# Altium PCB TSAL_ControlV2.1.PcbDoc (part 2 of 3)
Units mm, origin at the board's own origin, x right, y up, seen from the top; angles counter-clockwise.
Board outline 110 x 55.6 mm, 4 copper layers (Top Layer, GND, PWR, Bottom Layer), stack 1.488 mm thick; 168 components, 77 nets, 452 pads, 194 vias.
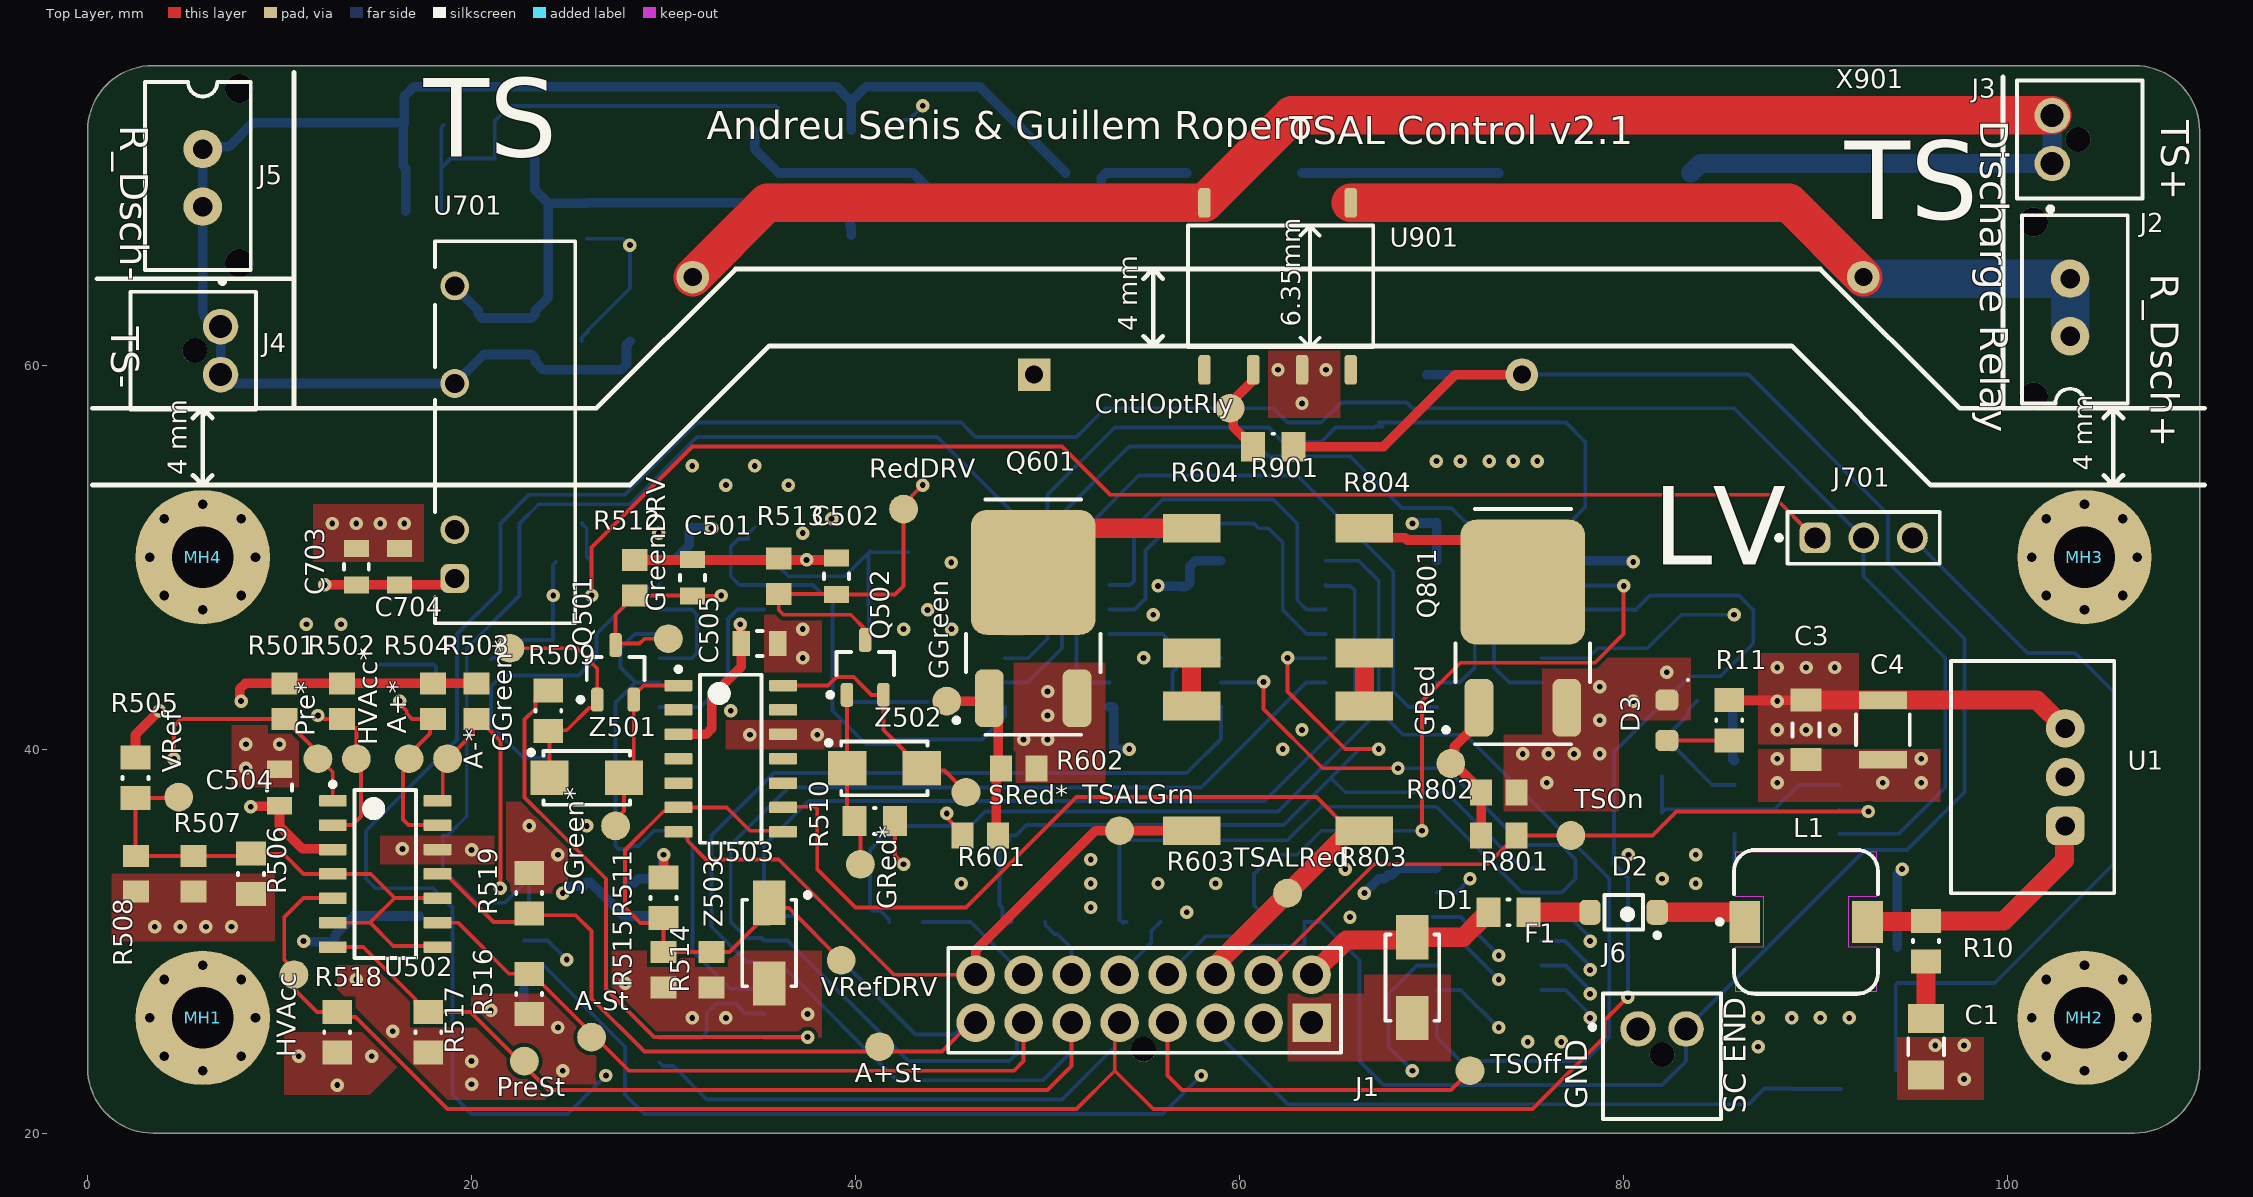
[diagram p0: Top Layer view]

## Part data (continued)
R501 R502 R503 R504 R512 R513 R602 R802: library part CMP-00076-3, "Res Thick Film 0805 1K Ohm 5% 1/8W ±200ppm/°C Molded SMD SMD Paper Tape on Plastic Reel", Case Code (Metric)=2012, Case/Package=0805, Manufacturer 1=Bourns, Manufacturer Part Number 1=CR0805-JW-102ELF, Max Operating Temperature=155°C, Max Power Dissipation=125mW, Min Operating Temperature=-55°C, Package Quantity=1, Resistor Type="Thick Film", Temperature Coefficient=200ppm/°C, Tolerance=5%, Voltage Rating=150V, .Creator=GP, Category="Chip SMD Resistors", ComponentLink1Description=https://datasheet.ciiva.com/11821/0900766b80fcdb72-11821134.pdf?src-supplier=RSComponents, ComponentLink1URL=https://datasheet.ciiva.com/11821/0900766b80fcdb72-11821134.pdf?src-supplier=RSComponents, ComponentLink2Description=https://datasheet.ciiva.com/15225/getdatasheetpartid-78155-15225381.pdf?src-supplier=Verical, ComponentLink2URL=https://datasheet.ciiva.com/15225/getdatasheetpartid-78155-15225381.pdf?src-supplier=Verical, ComponentLink3Description=https://datasheet.ciiva.com/22693/1902866-22693253.pdf?src-supplier=Element14, ComponentLink3URL=https://datasheet.ciiva.com/22693/1902866-22693253.pdf?src-supplier=Element14, ComponentLink4Description=https://datasheet.ciiva.com/7986/1856384-7986184.pdf?src-supplier=Element14, ComponentLink4URL=https://datasheet.ciiva.com/7986/1856384-7986184.pdf?src-supplier=Element14, ComponentLink5Description=https://datasheet.ciiva.com/7985/1856384-7985867.pdf?src-supplier=Element14, ComponentLink5URL=https://datasheet.ciiva.com/7985/1856384-7985867.pdf?src-supplier=Element14, ComponentLink6Description=https://datasheet.ciiva.com/30242/159chpreztr-30242765.pdf?src-supplier=Onlinecomponents.com, ComponentLink6URL=https://datasheet.ciiva.com/30242/159chpreztr-30242765.pdf?src-supplier=Onlinecomponents.com, ComponentLink7Description=https://datasheet.ciiva.com/6547/chpreztr-6547359.pdf?src-supplier=Digi-Key, ComponentLink7URL=https://datasheet.ciiva.com/6547/chpreztr-6547359.pdf?src-supplier=Digi-Key, Contact Plating=Tin, Depth=1.25mm, Design Item ID=R1k-0805FTK, Features="Moisture Resistant", Height=0.5mm, Lead Free="Lead Free", Length=2mm, Military Standard=Not, Mount="Surface Mount", Number of Terminations=2, Packaging="Tape and Reel", Pins=2, Power rating=125mW, Pricing 1="1=0,05930, 10=0,03510, 25=0,01790, 100=0,00800, 250=0,00790, 500=0,00590, 1000=0,00360, 3000=0,00350, 6000=0,00250 (USD)", Radiation Hardening=No, REACH SVHC="No SVHC", RoHS=Yes, Source=Passives.SchLib, Stock 1=27510, Termination=SMD/SMT, Thickness=508um, Voltage Rating (DC)=150V, Width=1.25mm
R505: library part CMP-009-00046-1, "Fixed Resistor, Metal Glaze/thick Film, 0.125W, 12400ohm, 150V, 1% +/-Tol, 100ppm/Cel, Surface Mount, 0805", Case/Package=0805, Max Operating Temperature=155°C, Min Operating Temperature=-55°C, Power=125mW, Tolerance=1%, Mounting Technology="Surface Mount", Pins=2, RoHS Compliant=Yes
R507 R508 R514 R515 R601 R703 R709 R710 R801: library part CMP-00083-3, "Res Thick Film 0805 100 Ohm 1% 1/8W ±100ppm/°C Molded SMD SMD Paper Tape on Plastic Reel", Case Code (Metric)=2012, Case/Package=0805, Manufacturer 1=Bourns, Manufacturer Part Number 1=CR0805-FX-1000ELF, Max Operating Temperature=155°C, Max Power Dissipation=125mW, Min Operating Temperature=-55°C, Package Quantity=1, Resistance Tolerance=1%, Resistor Type="Thick Film", Temperature Coefficient=100ppm/°C, Voltage Rating=150V, .Creator=DR, Category="Chip SMD Resistors", ComponentLink1Description=https://datasheet.ciiva.com/11809/0900766b80fcdb72-11809178.pdf?src-supplier=RSComponents, ComponentLink1URL=https://datasheet.ciiva.com/11809/0900766b80fcdb72-11809178.pdf?src-supplier=RSComponents, ComponentLink2Description=https://datasheet.ciiva.com/6547/chpreztr-6547413.pdf?src-supplier=Digi-Key, ComponentLink2URL=https://datasheet.ciiva.com/6547/chpreztr-6547413.pdf?src-supplier=Digi-Key, ComponentLink3Description=https://datasheet.ciiva.com/6547/chpreztr-6547414.pdf?src-supplier=Digi-Key, ComponentLink3URL=https://datasheet.ciiva.com/6547/chpreztr-6547414.pdf?src-supplier=Digi-Key, ComponentLink4Description=https://datasheet.ciiva.com/6547/chpreztr-6547415.pdf?src-supplier=Digi-Key, ComponentLink4URL=https://datasheet.ciiva.com/6547/chpreztr-6547415.pdf?src-supplier=Digi-Key, ComponentLink5Description=https://datasheet.ciiva.com/9120/chpreztr-9120744.pdf?src-supplier=Avnet, ComponentLink5URL=https://datasheet.ciiva.com/9120/chpreztr-9120744.pdf?src-supplier=Avnet, Construction=Rectangular, Contact Plating=Tin, Depth=1.25mm, Design Item ID=R100-0805FTK, Features="Moisture Resistant", Height=0.5mm, Length=2mm, Military Standard=Not, Mount="Surface Mount", Number of Terminations=2, Packaging="Tape and Reel", Pins=2, Power rating=125mW, Pricing 1="1=0,05840, 10=0,03430, 25=0,01780, 100=0,00750, 250=0,00560, 500=0,00490, 3000=0,00470 (USD)", Radiation Hardening=No, REACH SVHC="No SVHC", RoHS=Yes, RoHS Compliant=Yes, Series=CR0805, Source=Passives.SchLib, Stock 1=49802, Technology="THICK FILM", Termination=SMD/SMT, Thickness=508um, Tolerance=1%, Voltage Rating (DC)=150V, Width=1.25mm
R509 R510 R708: library part CMP-009-00027-3, "Fixed Resistor, Metal Glaze/thick Film, 0.5W, 2000ohm, 150V, 1% +/-Tol, 100ppm/Cel, Surface Mount, 0805", Case/Package=0805, Manufacturer=Vishay, Max Operating Temperature=155°C, Min Operating Temperature=-55°C, Part Number=CRCW08052K00FKEAHP, Power=500mW, Tolerance=1%, Mounting Technology="Surface Mount", Pins=2, RoHS Compliant=Yes
R516 R517 R518 R519: library part CMP-009-00008-6, "Fixed Resistor, Metal Glaze/thick Film, 0.125W, 560000ohm, 150V, 1% +/-Tol, 100ppm/Cel, Surface Mount, 0805", Case/Package=0805, Max Operating Temperature=155°C, Min Operating Temperature=-55°C, Power=125mW, Tolerance=1%, Mounting Technology="Surface Mount", Pins=2, RoHS Compliant=Yes
R603 R604 R803 R804: library part CMP-00075-7, "Res Thick Film 2512 15 Ohm 1% 2W ±100ppm/C Pad SMD T/R", Case Code (Metric)=6432, Case/Package=2512, Manufacturer 1="TE Connectivity", Manufacturer Part Number 1=352115RFT, Max Operating Temperature=155°C, Max Power Dissipation=2W, Min Operating Temperature=-55°C, Number of Resistors=1, Resistance Tolerance=1%, Resistor Type="Thick Film,Power resistor", Temperature Coefficient=100ppm/°C, Voltage Rating=250V, .Creator=DR, Category="Chip SMD Resistors", ComponentLink1Description=Datasheet, ComponentLink1URL=https://docs.rs-online.com/8bc1/0900766b81096b90.pdf, ComponentLink2Description="Where buy it", ComponentLink2URL=https://es.rs-online.com/web/p/resistencias-de-montaje-en-superficie/7551110, ComponentLink3Description=https://datasheet.ciiva.com/25610/0900766b81096b90-25610033.pdf?src-supplier=RSComponents, ComponentLink3URL=https://datasheet.ciiva.com/25610/0900766b81096b90-25610033.pdf?src-supplier=RSComponents, ComponentLink4Description=https://datasheet.ciiva.com/46391/1610601-46391493.pdf?src-supplier=Element14, ComponentLink4URL=https://datasheet.ciiva.com/46391/1610601-46391493.pdf?src-supplier=Element14, ComponentLink5Description=https://datasheet.ciiva.com/7657/1610601-7657542.pdf?src-supplier=Element14, ComponentLink5URL=https://datasheet.ciiva.com/7657/1610601-7657542.pdf?src-supplier=Element14, Depth=3.2mm, Design Item ID=R15-2512FTK, ELV=Compliant, Features="Automotive AEC-Q200", Height=0.55mm, Length=6.3mm, Mount="Surface Mount", Number of Terminations=2, Packaging="Tape and Reel", Pricing 1="10=0,64300, 250=0,62200, 1000=0,60000, 2000=0,55400, 2500=0,52100 (USD)", REACH SVHC="No SVHC", RoHS=Yes, RoHS Compliant=Yes, Series="3521, CGS", Source=Passives.SchLib, Stock 1=1, Technology="THICK FILM", Termination=Solder, Tolerance=1%, Voltage Rating (DC)=250V
R701: library part CMP-00093-3, "Res Thick Film 0805 470 Ohm 1% 1/8W ±100ppm/°C Molded SMD SMD Paper Tape on Plastic Reel", Case Code (Metric)=2012, Case/Package=0805, Manufacturer 1=Bourns, Manufacturer Part Number 1=CR0805-FX-4700GLF, Max Operating Temperature=155°C, Max Power Dissipation=125mW, Min Operating Temperature=-55°C, Resistance Tolerance=1%, Resistor Type="Thick Film", Temperature Coefficient=100ppm/°C, Voltage Rating=150V, .Creator=DR, Category="Chip SMD Resistors", ComponentLink1Description=https://datasheet.ciiva.com/11808/0900766b80fcdb72-11808686.pdf?src-supplier=RSComponents, ComponentLink1URL=https://datasheet.ciiva.com/11808/0900766b80fcdb72-11808686.pdf?src-supplier=RSComponents, ComponentLink2Description=https://datasheet.ciiva.com/7985/1856384-7985880.pdf?src-supplier=Element14, ComponentLink2URL=https://datasheet.ciiva.com/7985/1856384-7985880.pdf?src-supplier=Element14, ComponentLink3Description=https://datasheet.ciiva.com/22693/1902866-22693247.pdf?src-supplier=Element14, ComponentLink3URL=https://datasheet.ciiva.com/22693/1902866-22693247.pdf?src-supplier=Element14, ComponentLink4Description=https://datasheet.ciiva.com/5541/chpreztr-5541930.pdf?src-supplier=Mouser, ComponentLink4URL=https://datasheet.ciiva.com/5541/chpreztr-5541930.pdf?src-supplier=Mouser, Construction=Rectangular, Contact Plating=Tin, Depth=1.25mm, Design Item ID=R470-0805FTK, Features="Moisture Resistant", Height=0.5mm, Length=2mm, Military Standard=Not, Mount="Surface Mount", Number of Terminations=2, Packaging="Tape and Reel", Pins=2, Power rating=125mW, Pricing 1="1=0,00990, 10=0,00980, 25=0,00950, 50=0,00940, 100=0,00930, 250=0,00920, 500=0,00910, 1000=0,00890, 3000=0,00870, 6000=0,00860 (USD)", Radiation Hardening=No, REACH SVHC="No SVHC", RoHS=Yes, Series=CR0805, Source=Passives.SchLib, Stock 1=12623, Technology="THICK FILM", Termination=SMD/SMT, Thickness=508um, Tolerance=1%, Voltage Rating (DC)=150V
R704 R901: library part CMP-009-00035-5, "Resistor, 10K, 0.25W, Thick Film, 0805 Rohs Compliant: Yes", Resistance=10k
R705: library part CMP-00108-3, "Current Sense Resistors - SMD 3watts .002ohms 1%", Case Code (Imperial)=2512, Case Code (Metric)=6432, Manufacturer="Vishay Dale", Manufacturer Part Number=WSLP25122L000FEA, Max Operating Temperature=170°C, Min Operating Temperature=-65°C, Package Quantity=2000, Power rating=3W, Resistance=2M, Resistor Type="Metal Strip", Temperature Coefficient=275ppm/°C, Tolerance=1%, Case/Package=2512, Category="Chip SMD Resistors", ComponentLink1Description=https://datasheet.ciiva.com/48527/wslp-48527354.pdf?src-supplier=Avnet, ComponentLink1URL=https://datasheet.ciiva.com/48527/wslp-48527354.pdf?src-supplier=Avnet, Design Item ID=R2M-2512FTK, Height=0.635mm, Lead Free="Lead Free", Length=6.4mm, Mount="Surface Mount", Packaging="Tape and Reel", Pricing 1="1=1,07000, 10=1,07000, 50=1,07000, 100=1,07000, 1000=0,77100, 10000=0,75500 (USD)", RoHS=Yes, RoHS Compliant=Yes, Series=WSLP, Size Code=2512, Source=Passives.SchLib, Stock 1=11994, Termination=SMD/SMT, Weight=0.001429oz, Width=3.2mm
R707: library part CMP-009-00018-5, "Fixed Resistor, Metal Glaze/thick Film, 0.125W, 51000ohm, 150V, 1% +/-Tol, 100ppm/Cel, Surface Mount, 0805. ERJ-6ENF5102V", Case/Package=0805, Max Operating Temperature=155°C, Min Operating Temperature=-55°C, Power=125mW, Tolerance=1%, Mounting Technology="Surface Mount", Pins=2, RoHS Compliant=Yes
U1: library part CMP-019-00006-2, "Switching Regulator 36V In / 12 V Out, 1A. 173011235", RoHS Compliant=Yes
U101 U302: library part CMP-00213-1, "AND Gate, 4000/14000/40000 Series, 3-Func, 3-Input, CMOS, PDSO14", Case/Package=SOP, Load Capacitance (CL)=50pF, Max Operating Temperature=125°C, Max Supply Voltage=18V, Min Operating Temperature=-55°C, Min Supply Voltage=3V, Nominal Supply Voltage=5V, Package Body Material=Plastic, Package Equivalence Code=SOP14,.25, Package Shape=Rectangular, Package Style="SMALL OUTLINEMeter", Peak Reflow Temperature (Cel)=260°C, Power Supplies=5/15V, Temperature Grade=MILITARY, Channels=3, Height - Seated (Max)=1.75mm, JESD-30 Code=R-PDSO-G14, JESD-609 Code=e4, Length=8.65mm, Load/Preset Input=Yes, Logic Type="AND GATE", Moisture Sensitivity Level=1, Number of Inputs=3, Packaging=Rail/Tube, Pins=14, Prop. Delay@Nom-Sup=250ns, Propagation Delay (tpd)=250ns, Qualification Status="Not Qualified", Reach SVHC Compliant=Yes, RoHS Compliant=Yes, Schmitt Trigger=No, Surface Mount=Yes, Technology=CMOS, Terminal Finish=Nickel, Terminal Form="Gull Wing", Terminal Pitch=1.27mm, Terminal Position=DUAL, Width=3.9mm
U201 U501: library part CMP-00217-1, "OR Gate, 4000/14000/40000 Series, 2-Func, 4-Input, CMOS, PDSO14", Case/Package=SOP, Load Capacitance (CL)=50pF, Max Operating Temperature=125°C, Max Supply Voltage=18V, Min Operating Temperature=-55°C, Min Supply Voltage=3V, Nominal Supply Voltage=5V, Package Body Material=Plastic, Package Equivalence Code=SOP14,.25, Package Shape=Rectangular, Package Style="SMALL OUTLINEMeter", Peak Reflow Temperature (Cel)=260°C, Power Supplies=5/15V, Temperature Grade=MILITARY, Channels=2, Height - Seated (Max)=1.75mm, JESD-30 Code=R-PDSO-G14, JESD-609 Code=e4, Length=8.65mm, Logic Type="OR GATE", Moisture Sensitivity Level=1, Number of Inputs=4, Output Characteristics=OPEN-COLLECTOR, Packaging=Rail/Tube, Pins=14, Prop. Delay@Nom-Sup=250ns, Propagation Delay (tpd)=250ns, Qualification Status="Not Qualified", Reach SVHC Compliant=Yes, RoHS Compliant=Yes, Schmitt Trigger=No, Surface Mount=Yes, Technology=CMOS, Terminal Finish=Nickel, Terminal Form="Gull Wing", Terminal Pitch=1.27mm, Terminal Position=DUAL, Width=3.9mm
U202: library part CMP-00211-1, "NAND Gate, 4000/14000/40000 Series, 4-Func, 2-Input, CMOS, PDSO14", Case/Package=SOP, Load Capacitance (CL)=50pF, Max Operating Temperature=125°C, Max Supply Voltage=18V, Min Operating Temperature=-55°C, Min Supply Voltage=3V, Nominal Supply Voltage=5V, Package Body Material=Plastic, Package Equivalence Code=SOP14,.25, Package Shape=Rectangular, Package Style="SMALL OUTLINEMeter", Peak Reflow Temperature (Cel)=260°C, Power Supplies=5/15V, Temperature Grade=MILITARY, Channels=4, Height - Seated (Max)=1.75mm, JESD-30 Code=R-PDSO-G14, JESD-609 Code=e4, Length=8.65mm, Load/Preset Input=Yes, Logic Type="NAND GATE", Moisture Sensitivity Level=1, Number of Inputs=2, Packaging="Tape and Reel", Pins=14, Prop. Delay@Nom-Sup=250ns, Propagation Delay (tpd)=250ns, Qualification Status="Not Qualified", Reach SVHC Compliant=Yes, RoHS Compliant=Yes, Schmitt Trigger=No, Surface Mount=Yes, Technology=CMOS, Terminal Finish=Nickel, Terminal Form="Gull Wing", Terminal Pitch=1.27mm, Terminal Position=DUAL, Width=3.9mm
U301: library part CMP-00216-1, "XOR Gate, 4000/14000/40000 Series, 4-Func, 2-Input, CMOS, PDSO14", Case/Package=SOP, Load Capacitance (CL)=50pF, Max Operating Temperature=125°C, Max Supply Voltage=18V, Min Operating Temperature=-55°C, Min Supply Voltage=3V, Nominal Supply Voltage=5V, Package Body Material=Plastic, Package Equivalence Code=SOP14,.25, Package Shape=Rectangular, Package Style="SMALL OUTLINEMeter", Peak Reflow Temperature (Cel)=260°C, Power Supplies=5/15V, Temperature Grade=MILITARY, Channels=4, Height - Seated (Max)=1.75mm, JESD-30 Code=R-PDSO-G14, JESD-609 Code=e4, Length=8.65mm, Logic Type="XOR GATE", Moisture Sensitivity Level=1, Number of Inputs=2, Packaging="Tape and Reel", Pins=14, Prop. Delay@Nom-Sup=280ns, Propagation Delay (tpd)=280ns, Qualification Status="Not Qualified", Reach SVHC Compliant=Yes, RoHS Compliant=Yes, Schmitt Trigger=No, Surface Mount=Yes, Technology=CMOS, Terminal Finish=Nickel, Terminal Form="Gull Wing", Terminal Pitch=1.27mm, Terminal Position=DUAL, Width=3.9mm
U401: library part CMP-00215-1, "NAND Gate, 4000/14000/40000 Series, 3-Func, 3-Input, CMOS, CDIP14", Case/Package=DIP, Max Operating Temperature=125°C, Max Supply Voltage=15V, Min Operating Temperature=-55°C, Min Supply Voltage=5V, Nominal Supply Voltage=10V, Package Body Material=Metal, Package Shape=Rectangular, Package Style=IN-LINEMeter, Temperature Grade=MILITARY, Channels=3, Height - Seated (Max)=5.08mm, Logic Type="NAND GATE", Number of Inputs=3, Pins=14, Propagation Delay (tpd)=250ns, Qualification Status="Not Qualified", Surface Mount=No, Technology=CMOS, Terminal Form="Through Hole", Terminal Pitch=2.54mm, Terminal Position=DUAL, Width=7.62mm
U502 U503 U703: library part CMP-014-00006-1, "Comparator, 4 Func, 5000uV Offset-Max, 300ns Response Time, BIPolar, PDSO14", Case/Package=SOP, Max Operating Temperature=70°C, Min Operating Temperature=0°C, Nominal Supply Voltage=5V, Channels=4, Output Type=OPEN-COLLECTOR, Pins=14, RoHS Compliant=Yes
U701: library part CMP-019-00001-3, "WPME-FISM Fixed Isolated SIP/SMT Module"
U702: library part CMP-00181-3, "Precision timer for -55 to 85C operation 8-SOIC -40 to 85", Case/Package=SOIC, Frequency=500kHz, High Level Output Current=-200mA, Low Level Output Current=200mA, Manufacturer="Texas Instruments", Manufacturer Part Number=SA555D, Max Operating Temperature=85°C, Max Supply Voltage=16V, Min Operating Temperature=-40°C, Min Supply Voltage=4.5V, Nominal Supply Current=2mA, Operating Supply Current=10mA, Package Quantity=75, Quiescent Current=15mA, .Creator=DO, Category="Timers and Oscillators", ComponentLink1Description=https://datasheet.ciiva.com/1147/na555-1147816.pdf?src-supplier=Newark, ComponentLink1URL=https://datasheet.ciiva.com/1147/na555-1147816.pdf?src-supplier=Newark, ComponentLink2Description=https://datasheet.ciiva.com/14094/ne555-series-eng-tds-14094951.pdf?src-supplier=Distrelec, ComponentLink2URL=https://datasheet.ciiva.com/14094/ne555-series-eng-tds-14094951.pdf?src-supplier=Distrelec, ComponentLink3Description=https://datasheet.ciiva.com/1233/sa555-1233455.pdf?src-supplier=Digi-Key, ComponentLink3URL=https://datasheet.ciiva.com/1233/sa555-1233455.pdf?src-supplier=Digi-Key, ComponentLink4Description=https://datasheet.ciiva.com/1139/1851962-1139987.pdf?src-supplier=Element14, ComponentLink4URL=https://datasheet.ciiva.com/1139/1851962-1139987.pdf?src-supplier=Element14, ComponentLink5Description=https://datasheet.ciiva.com/15152/getdatasheetpartid-75292-15152565.pdf?src-supplier=Verical, ComponentLink5URL=https://datasheet.ciiva.com/15152/getdatasheetpartid-75292-15152565.pdf?src-supplier=Verical, ComponentLink6Description="Where buy it", ComponentLink6URL=https://www.mouser.es/ProductDetail/Texas-Instruments/SA555D?qs=gb35HGp1gQJkvy2FEVqR%2Fw%3D%3D, Contact Plating=Gold, Design Item ID=Timer_SA555, Height=1.58mm, Lead Free="Lead Free", Length=4.9mm, Mount="Surface Mount", Number of Pins=8, Number of Timers/Counters=1, Packaging=Rail/Tube, Pricing 1="1=0,93000, 10=0,83500, 25=0,79240, 100=0,65090, 250=0,60848, 500=0,53774, 1000=0,46725 (USD)", Radiation Hardening=No, REACH SVHC="No SVHC", RoHS=Yes, RoHS Compliant=Yes, Source="Integrated circuits.SchLib", Stock 1=1162, Weight=0.002561oz, Width=3.91mm
U901: library part CMP-00229-1, "Transistor Output SSR", Optoelectronic Device Type="TRANSISTOR OUTPUT SSR", Reach SVHC Compliant=Yes
X901: library part CMP-00224-4, "Dry Reed Relay, SPST-NC, 3500V switching voltage, 3A, 10kV isolation coil-contacts, 5504-24-1", JESD-609 Code=e3, Reach SVHC Compliant=Yes, Relay Type="DRY REED RELAY", RoHS Compliant=Yes, Terminal Finish=Tin
Z1 Z2 Z3 Z4: library part CMP-00159-3, "Diode Zener Single 10V 2% 500mW 2-Pin SOD-123 T/R", Case/Package=3000, Manufacturer=Vishay, Manufacturer Part Number=MMSZ5240C-HE3-08, Max Operating Temperature=150°C, Max Power Dissipation=500mW, Max Reverse Leakage Current=3uA, Min Operating Temperature=-55°C, Tolerance=2%, Zener Current=20mA, Zener Voltage=10V, .Creator=DO, Category="Zener Diodes", ComponentLink1Description=http://www.mouser.com/ds/2/427/mmsz5225-102133.pdf?src-supplier=Mouser, ComponentLink1URL=http://www.mouser.com/ds/2/427/mmsz5225-102133.pdf?src-supplier=Mouser, ComponentLink2Description=http://components.arrow.com/part/dataview/59571956S617370N5680?src-supplier=Arrow+Electronics, ComponentLink2URL=http://components.arrow.com/part/dataview/59571956S617370N5680?src-supplier=Arrow+Electronics, ComponentLink3Description=http://www.vishay.com/docs/85774/mmsz5225.pdf?src-supplier=Digi-Key, ComponentLink3URL=http://www.vishay.com/docs/85774/mmsz5225.pdf?src-supplier=Digi-Key, ComponentLink4Description="Where buy it", ComponentLink4URL=https://www.mouser.es/ProductDetail/Vishay-Semiconductors/MMSZ5240C-HE3-08?qs=ESFF34UzhwiGAVchySN1uQ%3D%3D, Design Item ID=DZ-0.01/75-SOD-123, Element Configuration=Single, Impedance=17R, Mount="Surface Mount", Packaging="Tape and Reel", Pins=2, Power Dissipation=500mW, Pricing 1="1=0,36000, 10=0,29800, 50=0,29800, 100=0,15800, 1000=0,07100, 10000=0,04700 (USD)", RoHS=Yes, RoHS Compliant=Yes, Source="Filter components.SchLib", Stock 1=4964, Voltage Tolerance=2%, Weight=0.000363oz
Z501 Z502: library part CMP-004-00007-3, "Zener Diode, 5.6V V(Z), 5%, 0.5W, Silicon, Unidirectional, DO-214AC", Max Operating Temperature=150°C, Min Operating Temperature=-65°C, Zener Voltage=5V6, Pins=2, RoHS Compliant=Yes
Z503: library part CMP-004-00020-2, "Zener Diode, 3.6V V(Z), 5.56%, 1.25W, Silicon, Unidirectional, DO-214AC, BZG05C3V6-M3-08", Max Operating Temperature=150°C, Zener Voltage=3V6, Pins=2, RoHS Compliant=Yes

## Via types
v1: diameter 0.7, hole 0.3, Top Layer to Bottom Layer, tented both sides, 158 vias
v2: diameter 0.7, hole 0.5, Top Layer to Bottom Layer, tented both sides, 32 vias
v3: diameter 1.5, hole 1.5, Top Layer to Bottom Layer, tented both sides, 4 vias

## Nets (pads, with @x,y where several pads share a name; then routed paths per layer and width w, separated by ;. In a path a pad name is that pad's centre, name@x,y a point inside that pad or via, vN(x,y) a via of type N, cw(c..) or ccw(c..) an arc to the next point about the centre after c; other vN are vias at no path point)
+5TS: C701.1 C702.1 R701.1 R704.1 U701.4 U703.3 | length 30.7
  Bottom Layer w0.5: U701.4@19.125,64.12 19.125,64.075 20.35,62.85 20.35,62.65 20.55,62.45 C702.1@20.75,62.45 C701.1@22.921,62.45 ; C701.1@22.921,62.45 23.121,62.45 23.321,62.65 23.321,62.85 23.997,63.527 23.997,68.425 ; R704.1@23.3,70.75 23.3,69.122 23.997,68.425 ; R701.1@26,68.425 24.247,68.425 23.997,68.425 ; R701.1@26.032,68.457 38.973,68.457 39.72,67.71 39.72,67.25 39.77,67.2 U703.3@39.77,66.775